# Altium PCB AtomS3R-Proto.PcbDoc
Units mm, origin at the board's own origin, x right, y up, seen from the top; angles counter-clockwise.
Board outline 21.2 x 21.2 mm, 2 copper layers (TOP/SIG, BOTTOM/SIG), stack 0.98 mm thick; 1 components, 25 nets, 77 pads, 30 vias.
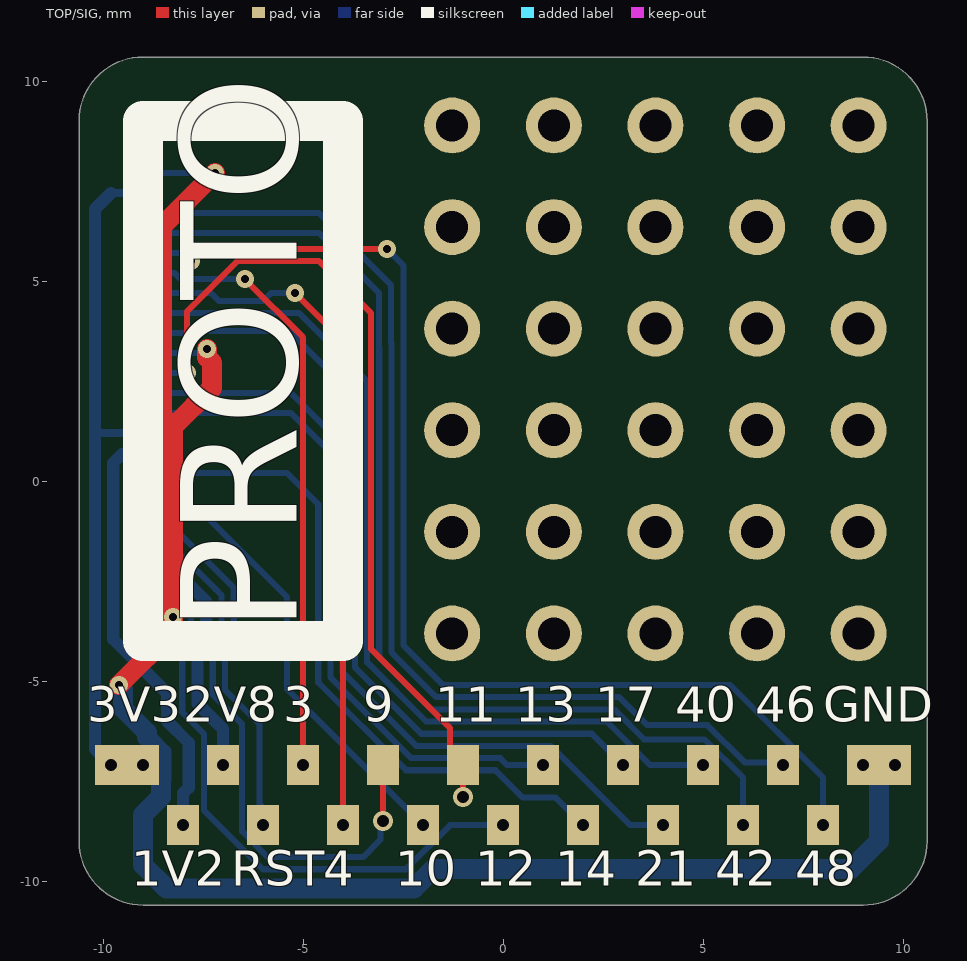
[diagram p0: TOP/SIG view]
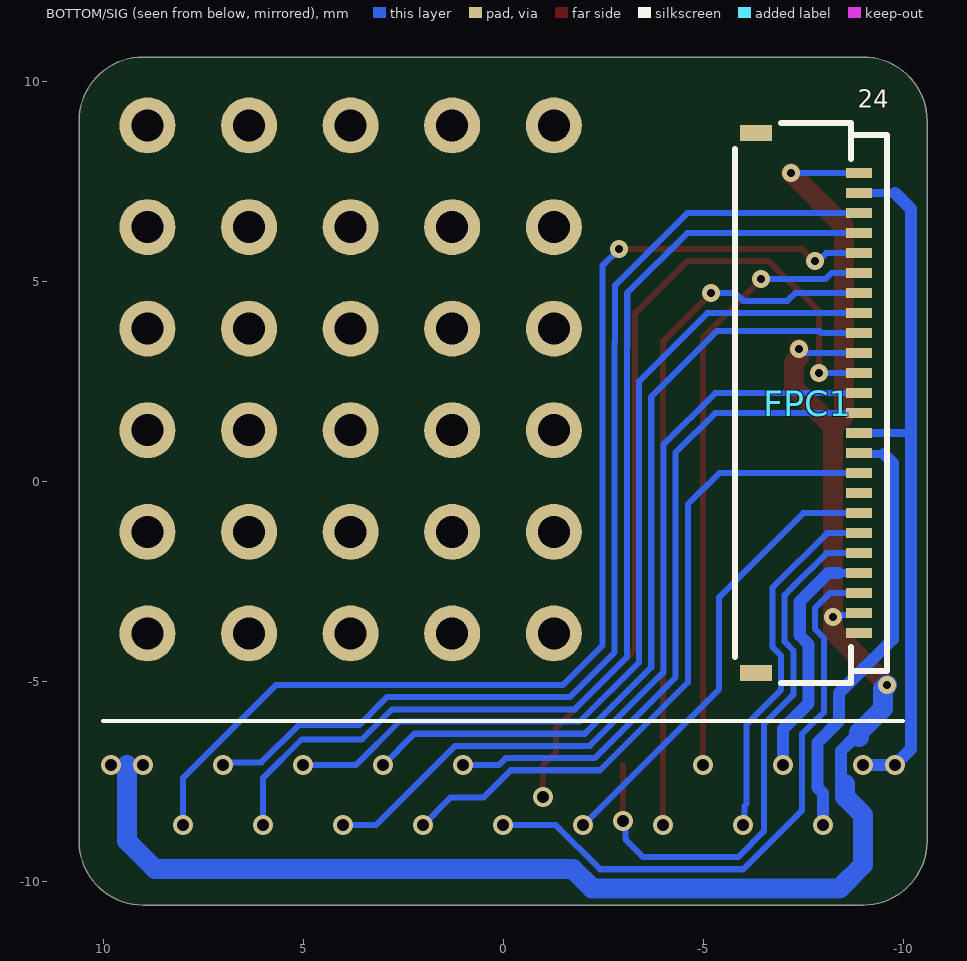
[diagram p1: BOTTOM/SIG view, seen from below]

## Layer stack, top to bottom
Top Solder: solder mask 0.0102, Solder Resist, Dk 3.5
TOP/SIG: signal copper 0.0356
Dielectric 1: core 0.9086, PP-006, Dk 4.2
BOTTOM/SIG: signal copper 0.0356
Bottom Solder: solder mask 0.0102, Solder Resist, Dk 3.5

## Board outline
-10.6,-9 ccw(c-9,-9) -9,-10.6 9,-10.6 ccw(c9,-9) 10.6,-9 10.6,9 ccw(c9,9) 9,10.6 -9,10.6 ccw(c-9,9) -10.6,9

## Design rules (kind name [scope] priority, off if disabled: settings)
Clearance [All] p1: gap=0.152 ignorepadtopadclearanceinfootprint=FALSE
DiffPairsRouting [All] p1: maxlimit=0.152 minlimit=0.152 mostfreqgap=0.152 toplayer_minwidth=0.152 toplayer_maxwidth=0.213 toplayer_prefwidth=0.213 bottomlayer_minwidth=0.152 bottomlayer_maxwidth=0.213 bottomlayer_prefwidth=0.213 maxuncoupledlength=12.7
Length [All] p1: maxlimit=2540 minlimit=0
MatchedLengths [All] p1: tolerance=0.406 checknetsindiffpair=TRUE checkdiffpairvsdiffpair=FALSE checkxsignals=FALSE checkothers=FALSE
PlaneConnect [All] p1: planeconnectstyle=Direct reliefexpansion=0.508 reliefentries=4 reliefconductorwidth=0.254 reliefairgap=0.254
PolygonConnect [All] p1: connectstyle=Direct reliefconductorwidth=0.254 reliefentries=4 polygonreliefangle="90 Angle" airgapwidth=0.254
RoutingVias [All] p1: holewidth=0.2 width=0.45 viastyle="Through Hole" minholewidth=0.2 minwidth=0.45 maxholewidth=0.2 maxwidth=0.45 viatemplateguid#1={935B8C24-25E0-4337-8623-02A2FD610356} viatemplatename#1=v61h30m0mx0
SolderMaskExpansion [All] p1: expansion=0.102 istentingtop=FALSE
Width [All] p1: maxlimit=0.889 minlimit=0.152 preferedwidth=0.254 minimp=50.000000 maximp=50.000000 favimp=50.000000
28 further rules are at their usual default settings.

## Components (designator, comment, footprint, x,y, rotation, side; value= is the part's Value field where it differs from the comment)
FPC1 "FPC-0.5-24P" FPC_0.5MM_24P_FH34 -7.612,1.95 r270 bottom

## Footprints (in the part's own frame and the unit in brackets; to place one, negate y for a bottom-side part, rotate by r counter-clockwise, add the part's x,y. Pads: shape width x height; smd on the part's side, far side on the other; paste and mask are expansions set on the pad)
FPC_0.5MM_24P_FH34 [mm] "FH34SRJ-24S-0.5SH"
  rect 0.25x0.65 smd: 1(5.75,1.288) 2(5.25,1.288) 3(4.75,1.288) 4(4.25,1.288) 5(3.75,1.288) 6(3.25,1.288) 7(2.75,1.288) 8(2.25,1.288) 9(1.75,1.288) 10(1.25,1.288) 11(0.75,1.288) 12(0.25,1.288) 13(-0.25,1.288) 14(-0.75,1.288) 15(-1.25,1.288) 16(-1.75,1.288) 17(-2.25,1.288) 18(-2.75,1.288) 19(-3.25,1.288) 20(-3.75,1.288) 21(-4.25,1.288) 22(-4.75,1.288) 23(-5.25,1.288) 24(-5.75,1.288)
  rect 0.4x0.8 smd: 25(-6.75,-1.288) 26(6.75,-1.288)
  silkscreen extent -7,-1.81 7,1.99, body extent -7,-1.8 7,2, height 1

## Part data
FPC1: "OV9650/OV2460/OV3640/OV5640"

## Free pads (board coordinates)
  round 1.4 hole 0.8: 1(-1.27,-3.81) 1(-1.27,-1.27) 1(-1.27,1.27) 1(-1.27,3.81) 1(-1.27,6.35) 1(-1.27,8.89) 1(1.27,-3.81) 1(1.27,-1.27) 1(1.27,1.27) 1(1.27,3.81) 1(1.27,6.35) 1(1.27,8.89) 1(3.81,-3.81) 1(3.81,-1.27) 1(3.81,1.27) 1(3.81,3.81) 1(3.81,6.35) 1(3.81,8.89) 1(6.35,-3.81) 1(6.35,-1.27) 1(6.35,1.27) 1(6.35,3.81) 1(6.35,6.35) 1(6.35,8.89) 1(8.89,-3.81) 1(8.89,-1.27) 1(8.89,1.27) 1(8.89,3.81) 1(8.89,6.35) 1(8.89,8.89)
  rect 0.8x1 smd: 2(-9.8,-7.1) 2(-9,-7.1) 2(9.8,-7.1) 3(-8,-8.6) 3(-6,-8.6) 3(-4,-8.6) 3(-2,-8.6) 3(0,-8.6) 3(2,-8.6) 3(4,-8.6) 3(6,-8.6) 3(8,-8.6) 4(-7,-7.1) 4(-5,-7.1) 4(-3,-7.1) 4(-1,-7.1) 4(1,-7.1) 4(3,-7.1) 4(5,-7.1) 4(7,-7.1) 4(9,-7.1)

## Via types
v1: diameter 0.5, hole 0.3, TOP/SIG to BOTTOM/SIG, tented both sides, 21 vias
v2: diameter 0.45, hole 0.2, TOP/SIG to BOTTOM/SIG, tented both sides, 9 vias

## Nets (pads, with @x,y where several pads share a name; then routed paths per layer and width w, separated by ;. In a path a pad name is that pad's centre, name@x,y a point inside that pad or via, vN(x,y) a via of type N, cw(c..) or ccw(c..) an arc to the next point about the centre after c; other vN are vias at no path point)
AVDD: FPC1.4 pad.4@-7,-7.1 | length 6.2
  BOTTOM/SIG w0.2: FPC1.4 -8.4,-2.3
  BOTTOM/SIG w0.305: -8.4,-2.3 -8.131,-2.3 -7.419,-3.012 -7.419,-3.858 -7.639,-4.078 -7.639,-5.561 -7,-6.2 v1(-7,-7.1)
CAM_RST: FPC1.6 pad.3@-6,-8.6 | length 9.2
  BOTTOM/SIG w0.152: FPC1.6 -8.1,-1.3 -6.733,-2.667 -6.733,-4.142 -6.954,-4.362 -6.954,-5.215 -6.088,-6.081 -6.088,-8.074 -6.041,-8.121 -6.041,-8.559 v1(-6,-8.6)
DVDD: FPC1.10 pad.3@-8,-8.6 | length 10.8
  BOTTOM/SIG w0.2: -9.527,0.673 FPC1.10@-8.927,0.673
  BOTTOM/SIG w0.305: -9.527,0.673 -9.745,0.455 -9.745,-3.955 -8.401,-5.299 -8.401,-5.999 -7.86,-6.54 -7.86,-7.667 -8,-7.807 v1(-8,-8.6)
GND: FPC1.2 FPC1.15 FPC1.24 pad.2@9.8,-7.1 pad.4@9,-7.1 | length 46.7
  TOP/SIG w0.5: v2(-9.6,-5.1) -8.254,-3.754 v2(-8.254,-3.4) -8.254,1.349 ; v2(-7.4,3.3) -7.4,3.087 -7.273,2.96 -7.273,2.33 -8.254,1.349 ; v2(-7.2,7.7) -8.527,6.373 -8.527,1.623 -8.254,1.349
  BOTTOM/SIG w0.152: FPC1.2 -8.851,-3.349 -8.305,-3.349 v2(-8.254,-3.4) ; FPC1.15 -7.5,3.2 v2(-7.4,3.3) ; FPC1.24 v2(-7.2,7.7)
  BOTTOM/SIG w0.305: -8.9,-6.4 -8.8,-6.4 -8.445,-6.755 -8.445,-7.468 -8.555,-7.577
  BOTTOM/SIG w0.5: v2(-9.6,-5.1) -9.5,-5.2 -9.5,-5.685 -8.9,-6.285 -8.9,-6.4 ; -8.555,-7.577 -8.555,-7.9 -9,-8.345 -9,-9.6 -8.417,-10.183 -2.23,-10.183 -1.746,-9.7 8.7,-9.7 9.4,-9 9.4,-7.1
  other v1: 9,-7.1 9.8,-7.1
GPIO3: FPC1.19 pad.4@-5,-7.1 | length 15.3
  TOP/SIG w0.152: v2(-6.454,5.046) -5,3.593 v1(-5,-7.1)
  BOTTOM/SIG w0.152: FPC1.19 -8.208,5.2 -8.055,5.046 v2(-6.454,5.046)
GPIO4: FPC1.18 pad.3@-4,-8.6 | length 17.7
  TOP/SIG w0.152: v2(-5.2,4.7) -4,3.5 v1(-4,-8.6)
  BOTTOM/SIG w0.152: FPC1.18 -7.3,4.7 -7.105,4.505 -6,4.505 -5.805,4.7 v2(-5.2,4.7)
GPIO9: FPC1.5 pad.4@-3,-7.1 | length 14.4
  TOP/SIG w0.152: v1(-3,-8.5) pad.4@-3,-7.1
  BOTTOM/SIG w0.152: FPC1.5 -8.093,-1.8 -7.184,-2.708 -7.038,-2.855 -7.038,-4.016 -7.258,-4.236 -7.258,-5.342 -6.521,-6.079 -6.521,-8.755 -5.877,-9.4 -3.5,-9.4 -3.067,-8.967 -3.067,-8.567 v1(-3,-8.5)
GPIO10: FPC1.7 pad.3@-2,-8.6 | length 11.5
  BOTTOM/SIG w0.152: FPC1.7 -7.5,-0.8 -5.4,-2.9 -5.4,-5.2 v1(-2,-8.6)
GPIO11: FPC1.14 pad.4@-1,-7.1 | length 21.3
  TOP/SIG w0.152: v2(-7.9,2.7) -7.9,4.241 -6.641,5.5 -4.6,5.5 -3.3,4.2 -3.3,-4.2 -1.324,-6.176 -1.324,-6.776 -1,-7.1 v1(-1,-7.9)
  BOTTOM/SIG w0.152: FPC1.14 v2(-7.9,2.7)
GPIO12: FPC1.3 pad.3@0,-8.6 | length 15.2
  BOTTOM/SIG w0.152: FPC1.3 -8.17,-2.8 -7.8,-3.17 -7.8,-3.7 -8.02,-3.92 -8.02,-5.78 -7.479,-6.321 -7.479,-8.229 -6.003,-9.705 -2.428,-9.705 -1.323,-8.6 v1(0,-8.6)
GPIO13: FPC1.12 pad.4@1,-7.1 | length 16.8
  BOTTOM/SIG w0.152: FPC1.12 -5.3,1.7 -4.314,0.714 -4.314,-4.91 -2.298,-6.926 -0.066,-6.926 0.108,-7.1 v1(1,-7.1)
GPIO14: FPC1.9 pad.3@2,-8.6 | length 17.2
  BOTTOM/SIG w0.152: FPC1.9 -5.4,0.2 -4.619,-0.581 -4.619,-5.036 -2.424,-7.231 -0.192,-7.231 0.493,-7.916 1.316,-7.916 v1(2,-8.6)
GPIO17: FPC1.16 pad.4@3,-7.1 | length 20.4
  BOTTOM/SIG w0.152: FPC1.16 -7.958,3.7 -7.905,3.754 -5.354,3.754 -3.705,2.105 -3.705,-4.657 -2.045,-6.317 2.217,-6.317 v1(3,-7.1)
GPIO18: 
GPIO21: FPC1.13 pad.3@4,-8.6 | length 20.7
  BOTTOM/SIG w0.152: FPC1.13 -5.3,2.2 -4.01,0.91 -4.01,-4.784 -2.172,-6.621 1.198,-6.621 3.177,-8.6 v1(4,-8.6)
GPIO40: FPC1.17 pad.4@5,-7.1 | length 22.7
  BOTTOM/SIG w0.152: FPC1.17 -5.1,4.2 -3.4,2.5 -3.4,-4.531 -1.919,-6.012 2.589,-6.012 3.677,-7.1 v1(5,-7.1)
GPIO42: FPC1.21 pad.3@6,-8.6 | length 27.1
  BOTTOM/SIG w0.152: FPC1.21 -4.6,6.2 -3.105,4.705 -3.105,3.336 -3.095,3.326 -3.095,-4.405 -1.793,-5.707 2.776,-5.707 3.531,-6.462 5.038,-6.462 6,-7.423 v1(6,-8.6)
GPIO46: FPC1.22 pad.4@7,-7.1 | length 27
  BOTTOM/SIG w0.152: FPC1.22 -4.6,6.7 -2.8,4.9 -2.8,3.462 -2.79,3.453 -2.79,-4.279 -1.667,-5.402 2.902,-5.402 3.6,-6.1 5.108,-6.1 6.041,-7.033 6.933,-7.033 v1(7,-7.1)
GPIO48: FPC1.20 pad.3@8,-8.6 | length 29.3
  TOP/SIG w0.152: v2(-7.8,5.5) -7.768,5.5 -7.463,5.805 -2.905,5.805 v2(-2.9,5.8)
  BOTTOM/SIG w0.152: FPC1.20 -8.081,5.7 -7.881,5.5 v2(-7.8,5.5) ; v2(-2.9,5.8) -2.486,5.386 -2.486,-4.114 -1.503,-5.097 5.674,-5.097 8,-7.423 v1(8,-8.6)
NetD1_A: 
NetFPC1_8: FPC1.8
SYS_SCL: 
SYS_SDA: 
VDD_3V3: FPC1.11 FPC1.23 pad.2@-9,-7.1 pad.2@-9.8,-7.1 | length 17.5
  BOTTOM/SIG w0.2: -10.1,1.2 FPC1.11 ; -9.8,7.2 FPC1.23
  BOTTOM/SIG w0.3: -9.8,7.2 -10.2,6.8 -10.2,-6.7 v1(-9.8,-7.1) v1(-9,-7.1)
VDD_3V3_IN: 
pads on no net: FPC1.1 FPC1.25 FPC1.26

## Silkscreen, mask and mechanical layers (free items; w line width, h text height)
Top Overlay:
  lines w1: -4,8.89 -4,-4 -9,-4 -9,9 -4,9
  text "PROTO" at -4.2,-3.81 h5 r90
  text "3V3" at -10.4,-6.3 h1.5
  text "2V8" at -8,-6.3 h1.5
  text "3" at -5.5,-6.3 h1.5
  text "9" at -3.5,-6.3 h1.5
  text "11" at -1.7,-6.3 h1.5
  text "13" at 0.3,-6.3 h1.5
  text "17" at 2.3,-6.3 h1.5
  text "40" at 4.3,-6.3 h1.5
  text "46" at 6.3,-6.3 h1.5
  text "GND" at 8,-6.3 h1.5
  text "1V2" at -9.3,-10.4 h1.5
  text "RST" at -6.8,-10.4 h1.5
  text "4" at -4.5,-10.4 h1.5
  text "10" at -2.7,-10.4 h1.5
  text "12" at -0.7,-10.4 h1.5
  text "14" at 1.3,-10.4 h1.5
  text "21" at 3.3,-10.4 h1.5
  text "42" at 5.3,-10.4 h1.5
  text "48" at 7.3,-10.4 h1.5
Bottom Overlay:
  lines w0.1: -10,-6 10,-6
  text "24" at -8.867,9.177 h0.76
Mechanical 1:
  the board outline again, w0.1